# Altium PCB PCB6.pcbdoc
Units mil, origin at the board's own origin, x right, y up, seen from the top; angles counter-clockwise.
Board outline 1685 x 1530 mil, 2 copper layers (Top Layer, Bottom Layer), stack 62.206 mil thick; 5 components, 4 nets, 22 pads, 8 vias.
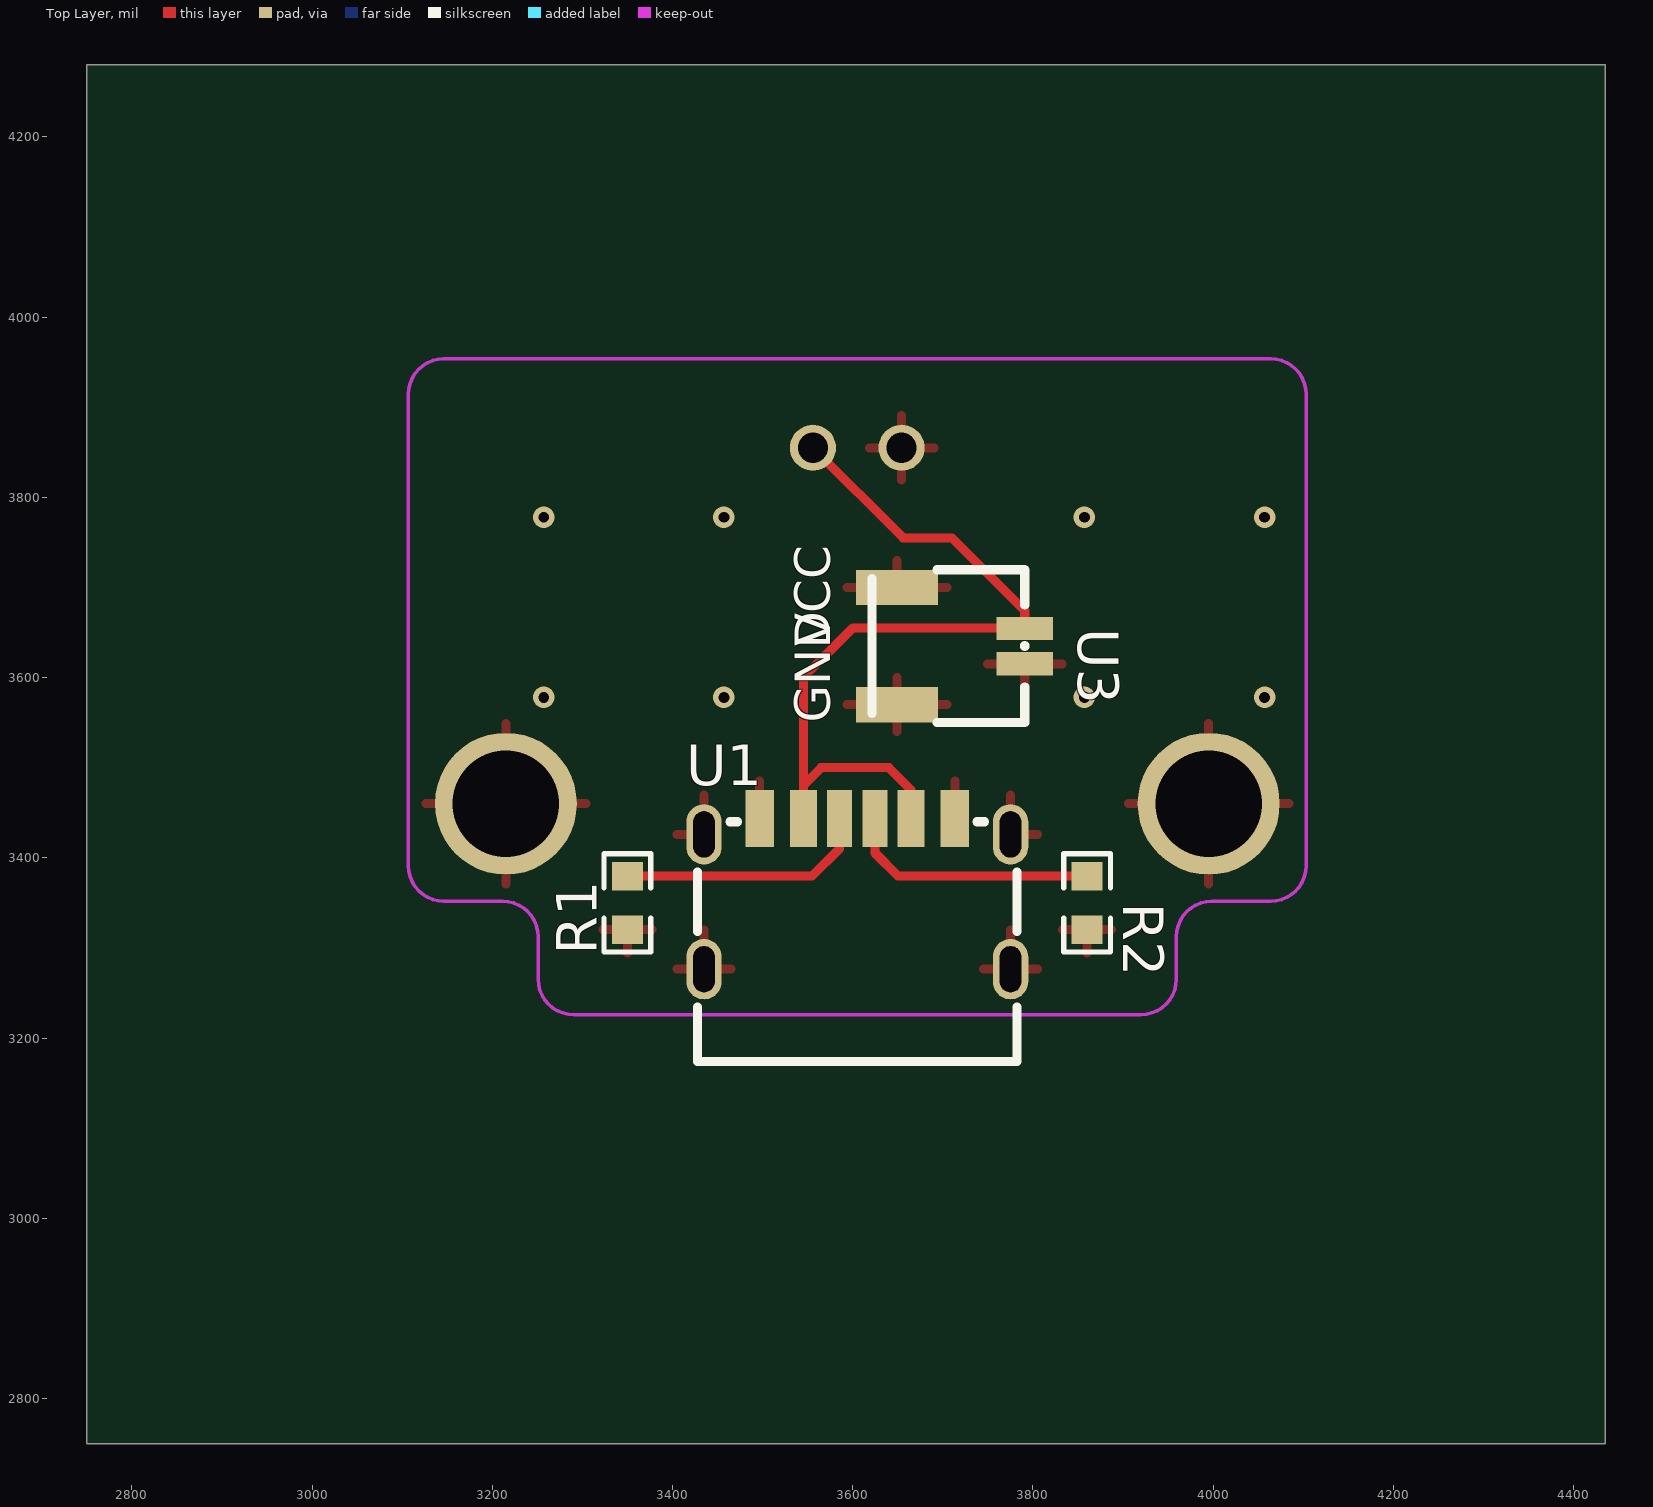
[diagram p0: Top Layer view]
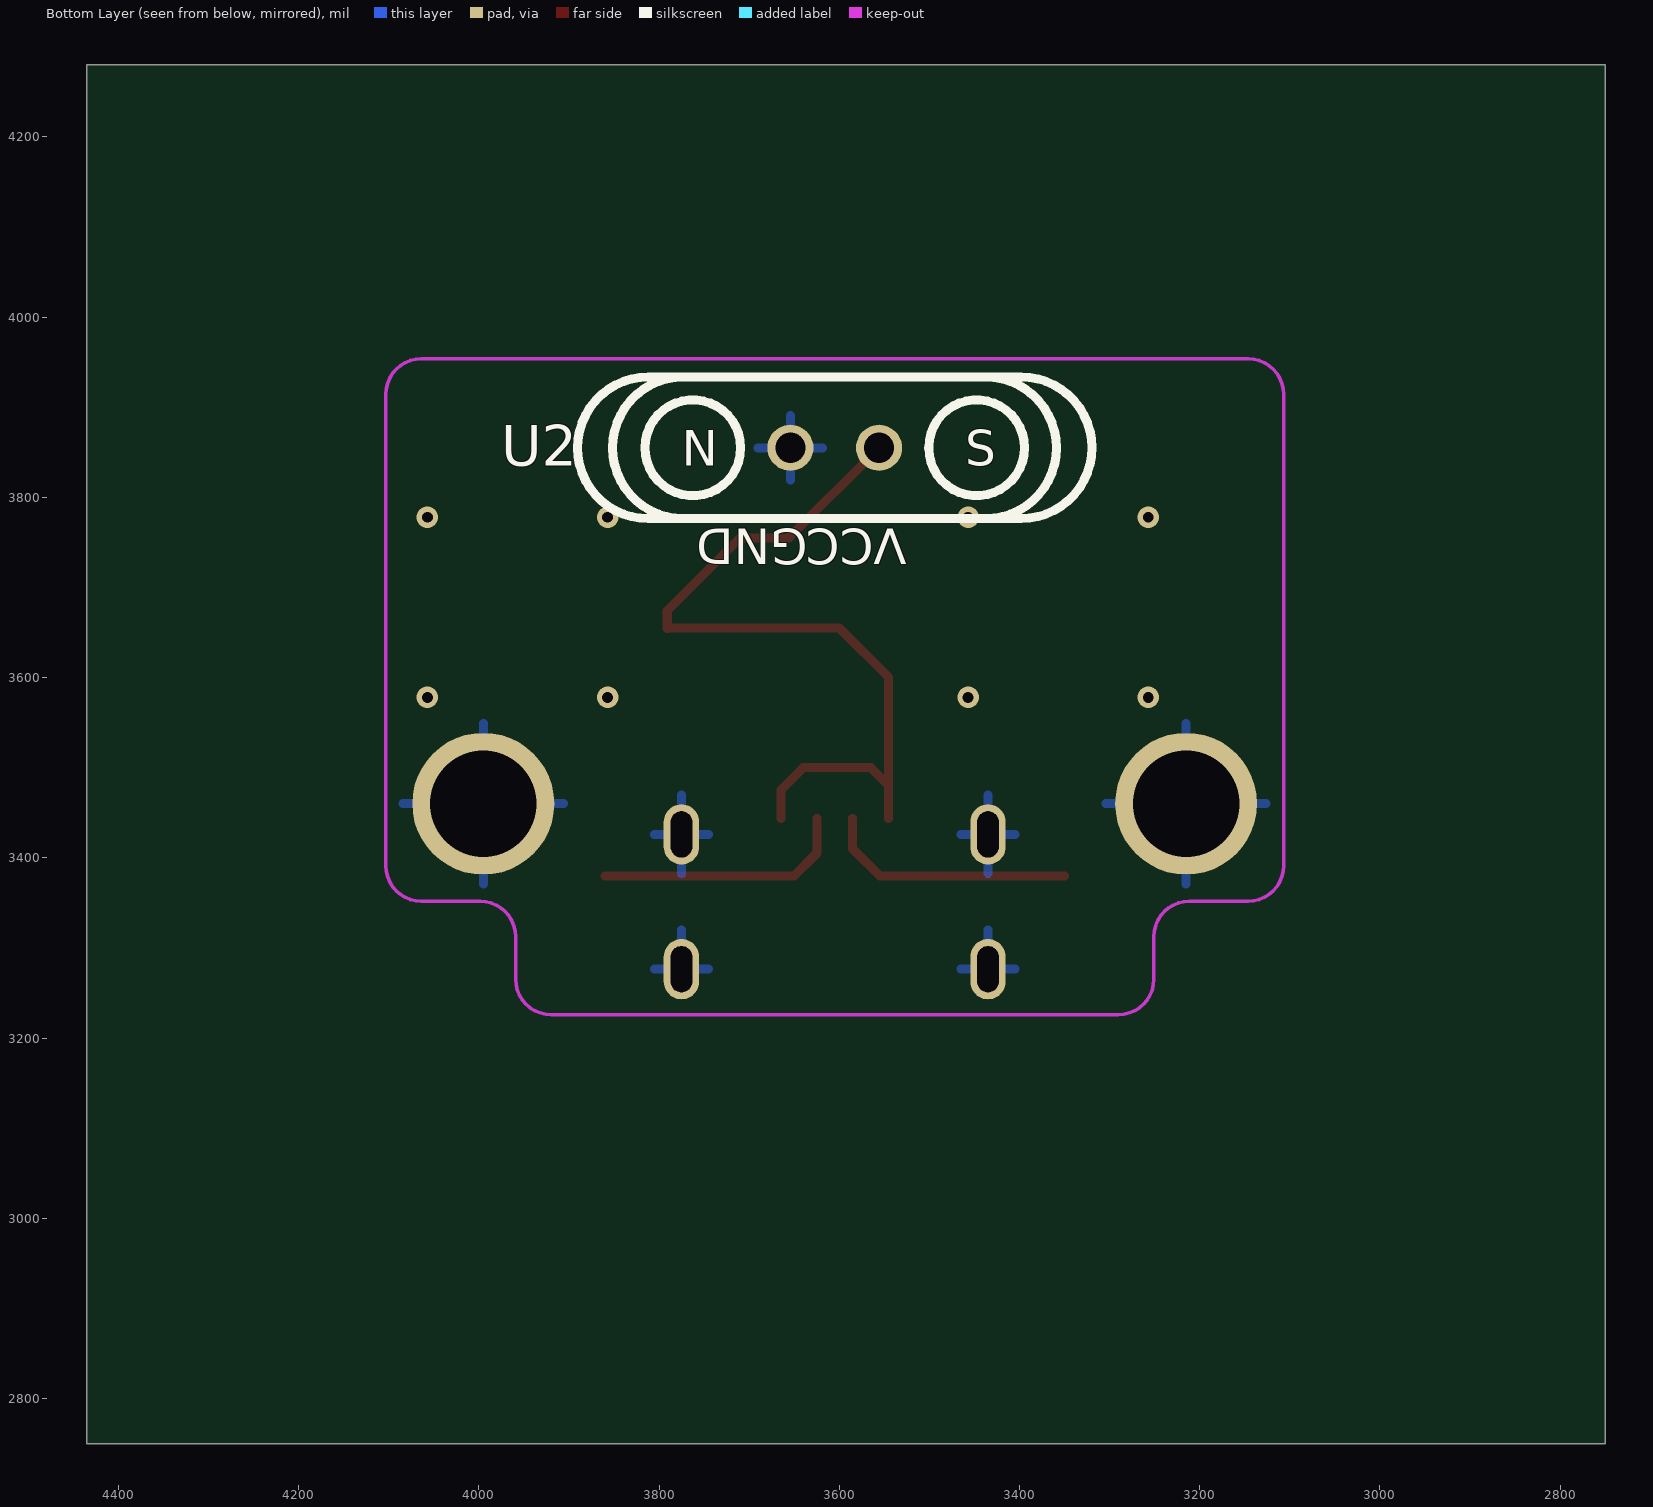
[diagram p1: Bottom Layer view, seen from below]

## Layer stack, top to bottom
Top Solder Mask Layer: solder mask 0.394, Dk 3.3
Top Layer: signal copper 1.379
Dielectric1: surface 59.449, FR4, Dk 4.5
Bottom Layer: signal copper 1.378
Bottom Solder Mask Layer: solder mask 0.394, Dk 3.3

## Board outline
4435,2750 2750,2750 2750,4280 4435,4280

## Design rules (kind name [scope] priority, off if disabled: settings)
BoardOutlineClearance copperThickness1oz [All] p0: genericclearance=10 ignorepadtopadclearanceinfootprint=FALSE except(0: Arc-SplitContinuation Track-SplitContinuation SMDPad-SplitContinuation THPad-SplitContinuation Via-SplitContinuation Fill-SplitContinuation Poly-SplitContinuation Region-SplitContinuation Text-SplitContinuation)
BoardOutlineClearance copperThickness2oz [All] p0: genericclearance=10 ignorepadtopadclearanceinfootprint=FALSE except(0: Arc-SplitContinuation Track-SplitContinuation SMDPad-SplitContinuation THPad-SplitContinuation Via-SplitContinuation Fill-SplitContinuation Poly-SplitContinuation Region-SplitContinuation Text-SplitContinuation)
BoardOutlineClearance otherClearance [All] p0: genericclearance=10 ignorepadtopadclearanceinfootprint=FALSE except(0: Arc-SplitContinuation Track-SplitContinuation SMDPad-SplitContinuation THPad-SplitContinuation Via-SplitContinuation Fill-SplitContinuation Poly-SplitContinuation Region-SplitContinuation Text-SplitContinuation)
Clearance copperThickness1oz [All] p1: gap=7 ignorepadtopadclearanceinfootprint=FALSE
Clearance copperThickness2oz [All] p1: gap=7 ignorepadtopadclearanceinfootprint=FALSE
Clearance otherClearance [All] p1: gap=7 ignorepadtopadclearanceinfootprint=FALSE
DiffPairsRouting differentialPair [All] p1: maxuncoupledlength=10 minlimit=6 maxlimit=Infinity mostfreqgap=6 toplayer_minwidth=5 toplayer_prefwidth=10 toplayer_maxwidth=100 bottomlayer_minwidth=5 bottomlayer_prefwidth=10 bottomlayer_maxwidth=100
PasteMaskExpansion pasteMaskExpansion [All] p1: expansion=0
PlaneConnect innerPlane [All] p1: planeconnectstyle=Relief reliefexpansion=20 reliefentries=4 reliefconductorwidth=10 reliefairgap=10
PolygonConnect copperRegion [All] p1: connectstyle=Relief reliefentries=4 reliefconductorwidth=10 polygonreliefangle="90 Angle" airgapwidth=10
RoutingVias viaSize [All] p1: viastyle="Through Hole" holewidth=12.0078 minholewidth=11.811 maxholewidth=248.0314 width=12.0078 minwidth=11.811 maxwidth=248.0314
SolderMaskExpansion solderMaskExpansion [All] p1: useseparateexpansions=TRUE expansion=2 expansionbottom=2
Width copperThickness1oz [All] p1: maxlimit=100 minlimit=5 preferedwidth=10
Width copperThickness2oz [All] p1: maxlimit=100 minlimit=8 preferedwidth=10

## Components (designator, comment, footprint, x,y, rotation, side; value= is the part's Value field where it differs from the comment)
R1 "" R0603 3350,3350 r90 top
R2 "" R0603 3860,3350 r90 top
U1 "" TYPE-C-SMD_YIYUAN_YTC-TC6-268 3605,3360 r0 top
U2 "" CONN-TH_PR5L4015-2P-C-F 3605,3855 r180 bottom
U3 "" CONN-SMD_2P-P1.00-WT 3720,3635 r270 top

## Footprints (in the part's own frame and the unit in brackets; to place one, negate y for a bottom-side part, rotate by r counter-clockwise, add the part's x,y. Pads: shape width x height; smd on the part's side, far side on the other; paste and mask are expansions set on the pad)
CONN-SMD_2P-P1.00-WT [mm]
  rect 0.65x1.6 smd: 1(-0.5,1.8) 2(0.5,1.8)
  rect 1x2.3 smd: 5(1.65,-1.8) 6(-1.65,-1.8)
  silkscreen extent -2.15,-2.5 2.15,1.8
CONN-TH_PR5L4015-2P-C-F [mm]
  round 1.3 hole 0.85: 1(-1.25,0) 2(1.25,0)
  silkscreen extent -7.25,-2 7.25,2
R0603 [mil]
  rect 31.75x34.02 smd: 1(-29.66,0) 2(29.66,0)
  silkscreen extent -55,-26 55,26
TYPE-C-SMD_YIYUAN_YTC-TC6-268 [mm]
  oval 1x1.7 hole 0.6 slot 1.3 at 90 deg: 1(-4.32,1.676) 2(4.32,1.676) 3(4.32,-2.125) 4(-4.32,-2.125)
  rect 0.7x1.6 smd: A5(-0.5,2.125) B5(0.5,2.125)
  rect 0.76x1.6 smd: A9(1.52,2.125) B9(-1.52,2.125)
  rect 0.8x1.6 smd: A12(2.75,2.125) B12(-2.75,2.125)
  silkscreen extent -4.5,-4.72 4.5,2.03

## Free pads (board coordinates)
  round 157.48 hole 118.11: ""(3215,3460) ""(3995,3460)

## Via types
v1: diameter 24.02, hole 12.01, Top Layer to Bottom Layer, 8 vias

## Nets (pads, with @x,y where several pads share a name; then routed paths per layer and width w, separated by ;. In a path a pad name is that pad's centre, name@x,y a point inside that pad or via, vN(x,y) a via of type N, cw(c..) or ccw(c..) an arc to the next point about the centre after c; other vN are vias at no path point)
$1N5: R2.2 U1.B5 | length 284.3
  Top Layer w10: U1.B5 3624.68,3405.32 3650.34,3379.66 R2.2
$1N6: R1.2 U1.A5 | length 281.3
  Top Layer w10: R1.2 3554.66,3379.66 3585.32,3410.32 U1.A5
GND: pad. R1.1 R2.1 U1.1 U1.2 U1.3 U1.4 U1.A12 U1.B12 U2.1 U3.2 U3.5 U3.6
  other v1: 3257.01,3577.99 3457.01,3577.99 3857.01,3577.99 4057.01,3577.99 3257.01,3777.99 3457.01,3777.99 3857.01,3777.99 4057.01,3777.99
VCC_5V: U1.A9 U1.B9 U2.2 U3.1 | length 924.2
  Top Layer w10: U1.B9 3545.16,3480.16 ; U2.2 3655.78,3755 3710,3755 3790.86,3674.14 U3.1 3790.55,3655 3600,3655 3545.16,3600.16 3545.16,3480.16 ; U1.A9 3664.84,3475.16 3640,3500 3565,3500 3545.16,3480.16

## Polygon pours and split planes (outlines as drawn)
GND on Top Layer (solid, remove dead copper, pour order 0): 3020,4010 4170,4010 4170,3055 3020,3055
GND on Bottom Layer (solid, remove dead copper, pour order 4): 3000,4030 4185,4030 4185,3000 3000,3000

## Keep-outs
Board Outline Layer:
  lines w3.94: 3106.89,3391.14 ccw(c3146.26,3391.14) 3146.26,3351.77 3211.51,3351.77 cw(c3211.51,3312.4) 3250.88,3312.4 3250.88,3265.24 ccw(c3290.25,3265.24) 3290.25,3225.87 3919.75,3225.87 ccw(c3919.75,3265.24) 3959.12,3265.24 3959.12,3312.4 cw(c3998.49,3312.4) 3998.49,3351.77 4063.74,3351.77 ccw(c4063.74,3391.14) 4103.11,3391.14 4103.11,3914.4 ccw(c4063.74,3914.4) 4063.74,3953.77 3146.26,3953.77 ccw(c3146.26,3914.4) 3106.89,3914.4 3106.89,3391.14

## Silkscreen, mask and mechanical layers (free items; w line width, h text height)
Top Silkscreen Layer:
  text "VCC" at 3575,3635 h39.37 r90
  text "GND" at 3575,3550 h39.37 r90
Bottom Silkscreen Layer:
  text "VCC" at 3525,3765 h39.37 r180
  text "GND" at 3635,3765 h39.37 r180

## Text inside footprints (layer, text, board x,y; h text height)
U2: Bottom Silkscreen Layer "N" at 3775,3835 h39.37; Bottom Silkscreen Layer "S" at 3460,3835 h39.37